# Altium PCB ESC.PcbDoc (part 2 of 2)
Units mil, origin at the board's own origin, x right, y up, seen from the top; angles counter-clockwise.
Board outline 1988.19 x 2913.39 mil, 2 copper layers (Top Layer, Bottom Layer); 78 components, 72 nets, 292 pads, 188 vias.
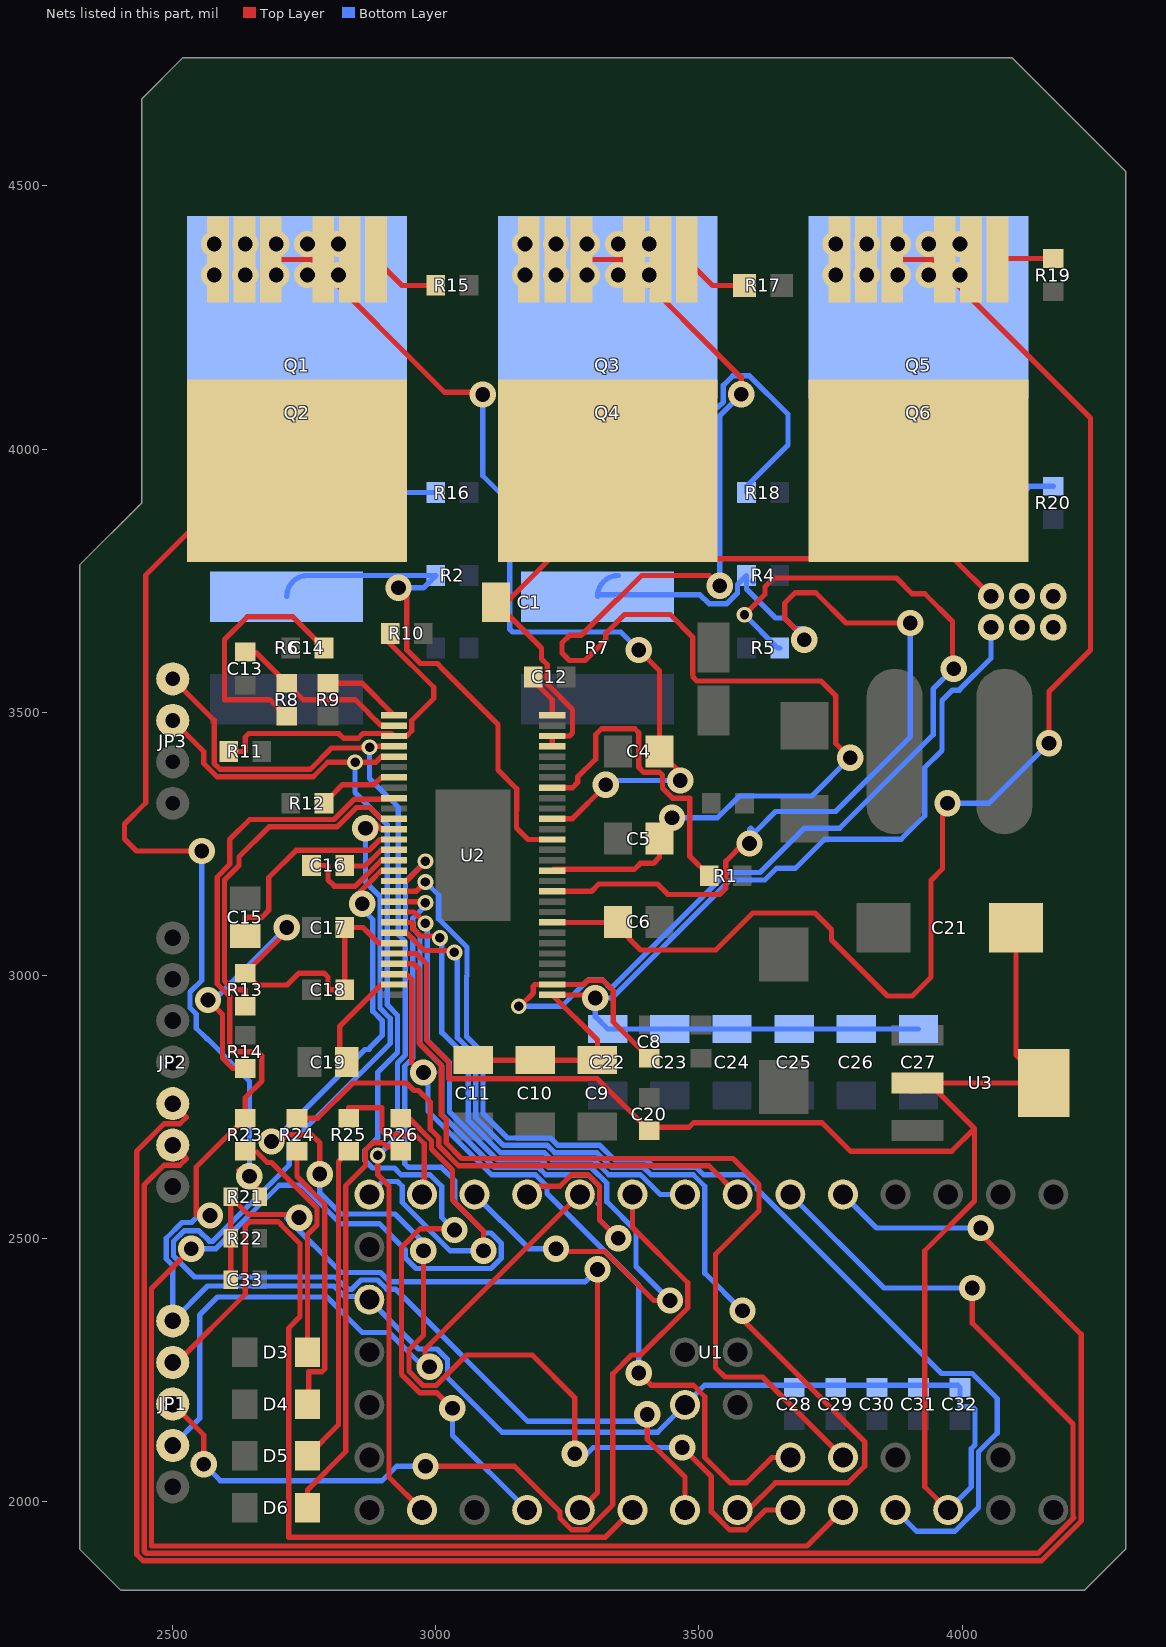
[diagram p2: the nets of this part, all layers, seen from the top]

## Via types
v1: diameter 50, hole 28, Top Layer to Bottom Layer, 133 vias
v2: diameter 20, hole 10, Top Layer to Bottom Layer, 32 vias
v3: diameter 30, hole 18, Top Layer to Bottom Layer, 23 vias

## Nets (pads, with @x,y where several pads share a name; then routed paths per layer and width w, separated by ;. In a path a pad name is that pad's centre, name@x,y a point inside that pad or via, vN(x,y) a via of type N, cw(c..) or ccw(c..) an arc to the next point about the centre after c; other vN are vias at no path point) (continued)
NetC8_2: C8.2 R5.1 U2.30 | length 2186.3
  Top Layer w10: v3(3157.48,2940.94) 3159.84,2940.94 3185.35,2966.46 3185.35,2979.69 3187.94,2982.28 3280.75,2982.28 3289.09,2990.63 3317.21,2990.63 3337.09,2970.75 3337.09,2910.95 C8.2@3405.51,2842.52 ; v3(3586.61,3685.04) 3625.67,3724.09 3625.67,3738.26 3642.13,3754.72 3875.22,3754.72 3904.91,3725.04 3929.28,3725.04 3981.99,3672.33 3981.99,3584.94 3986.67,3580.26 v1(3984.24,3582.67)
  Bottom Layer w10: v3(3157.48,2940.94) 3239.41,2940.94 3289.09,2990.63 3317.21,2990.63 3333.04,2974.8 3553.28,3195.04 3616.3,3195.04 3700.79,3279.53 3767.77,3279.53 3945.2,3456.96 3945.2,3543.62 v1(3984.24,3582.67) ; v3(3586.61,3685.04) 3649.61,3622.05 R5.1@3653.54,3622.05
NetC12_1: C12.1 U2.56 | length 87.9
  Top Layer w10: C12.1@3185.04,3566.93 3185.04,3560.17 3221.37,3523.84 U2.56@3221.37,3494.09
NetC13_2: C13.2 R8.2 U2.2 | length 340.9
  Top Layer w10: C13.2@2637.8,3614.17 2657.48,3614.17 R8.2@2716.54,3555.12 2748.03,3523.62 2847.21,3523.62 2872.52,3498.31 2872.52,3497.56 2895.67,3474.41 U2.2@2920.37,3474.41
NetC14_2: C14.2 R8.1 | length 476.7
  Top Layer w10: R8.1@2716.54,3492.13 2685.04,3523.62 2598.43,3523.62 2598.43,3637.8 2641.73,3681.1 2728.35,3681.1 C14.2@2787.4,3622.05
NetC15_1: C15.1 U2.13 | length 415.7
  Top Layer w10: C15.1@2637.8,3074.8 2637.8,3110.24 2669.29,3110.24 2682.71,3123.65 2682.71,3155.11 2682.59,3155.23 2682.59,3185.78 2734.1,3237.28 2872.97,3237.28 2893.56,3257.87 U2.13@2920.37,3257.87
NetC16_1: C16.1 U2.15 | length 209.4
  Top Layer w10: C16.1@2763.78,3208.66 2795.28,3208.66 2795.28,3181.1 2807.09,3169.29 2845.71,3169.29 2845.97,3169.56 2847.46,3169.56 2896.41,3218.5 U2.15@2920.37,3218.5
NetC16_2: C16.2 U2.14 | length 106.8
  Top Layer w10: C16.2@2826.77,3208.66 2827.94,3207.5 2865.69,3207.5 2877.98,3219.78 2880.12,3221.95 ; 2880.14,3221.95 2890.64,3232.44 2896.41,3238.19 U2.14@2920.37,3238.19
NetC17_2: C17.2 C18.2 R13.2 R14.1 U2.23 | length 957.6
  Top Layer w10: v1(2566.92,2952.75) 2594.49,2925.19 2594.49,2842.52 2614.17,2822.83 R14.1@2637.8,2822.83 ; v1(2716.53,3090.55) 2716.53,3082.67 R13.2@2637.8,3003.94 2660.51,2981.22 2717.44,2981.22 2740.16,3003.94 2787.4,3003.94 2795.28,2996.06 2795.28,2972.44 C18.2@2826.77,2972.44 C17.2@2826.77,3090.55 2861.65,3090.55 2891.18,3061.02 U2.23@2920.37,3061.02
  Bottom Layer w10: v1(2566.92,2952.75) 2578.74,2952.75 v1(2716.53,3090.55)
NetC19_2: C19.2 U2.27 | length 209.7
  Top Layer w10: C19.2@2830.71,2834.65 2817.58,2847.77 2817.58,2903.45 2896.41,2982.28 U2.27@2920.37,2982.28
NetC33_1: C33.1 R21.1 R22.1 U1.17/A3 | length 1449.6
  Top Layer w10: C33.1@2610.24,2421.26 R22.1@2610.24,2500 R21.1@2610.24,2578.74 2643.54,2545.43 2734.08,2545.43 v1(2740.15,2539.36) ; U1.17/A3@3273.62,1983.46 3307.09,2016.93 v1(3307.09,2440.94)
  Bottom Layer w10: v1@2740.15,2539.37 2717.27,2539.37 2716.53,2538.63 2820.32,2434.84 2894.9,2434.84 2912.42,2417.32 3283.46,2417.32 v1(3307.09,2440.94)
NetD3_A: D3.A R23.1 | length 462.5
  Top Layer w10: R23.1@2637.8,2665.35 2639.29,2663.86 2659.73,2663.86 2679.61,2643.98 2687.47,2643.98 2774.09,2557.36 2774.09,2525.31 2755.91,2507.12 D3.A@2755.91,2283.46
NetD4_A: D4.A R24.1 | length 530.6
  Top Layer w10: R24.1@2736.22,2665.35 2736.22,2617.35 2788.84,2564.73 2788.84,2251.76 2783.61,2246.53 2758.32,2246.53 2758.32,2187.46 D4.A@2755.91,2185.04
NetD5_A: D5.A R25.1 | length 611.4
  Top Layer w10: D5.A@2755.91,2086.61 2814.96,2145.67 2814.96,2645.67 R25.1@2834.65,2665.35
NetD6_A: D6.A R26.1 | length 804.9
  Top Layer w10: D6.A@2755.91,1988.19 2755.91,2021.98 2828.9,2094.97 2828.9,2600.55 2866.36,2638.02 2866.36,2647.03 2865.83,2647.57 2865.83,2667.4 2879.85,2681.42 2899.68,2681.42 2907.18,2673.91 2924.51,2673.91 R26.1@2933.07,2665.35
NetQ1_2: Q1.1 R15.1 | length 134.2
  Top Layer w10: Q1.1@2886.22,4360.24 2935.43,4311.02 R15.1@3000,4311.02
NetQ2_2: Q2.1 R16.1 | length 134.2
  Bottom Layer w10: Q2.1@2886.22,3868.11 2935.43,3917.32 R16.1@3000,3917.32
NetQ3_2: Q3.1 R17.1 | length 130.2
  Top Layer w10: Q3.1@3476.77,4360.24 3525.98,4311.02 R17.1@3586.61,4311.02
NetQ4_2: Q4.1 R18.1 | length 642.4
  Bottom Layer w10: Q4.1@3476.77,3868.11 3476.77,4051.57 3503.94,4078.74 3535.43,4078.74 3546.37,4089.68 3546.37,4121.18 3564.34,4139.14 3596.29,4139.14 3669.29,4066.14 3669.29,4007.9 3590.55,3929.16 R18.1@3590.55,3917.32
NetQ5_2: Q5.1 R19.1 | length 106.7
  Top Layer w10: Q5.1@4067.32,4360.24 4069.29,4362.2 R19.1@4173.23,4362.2
NetQ6_2: Q6.1 R20.1 | length 131.2
  Bottom Layer w10: Q6.1@4067.32,3868.11 4128.35,3929.13 R20.1@4173.23,3929.13
NetR1_1: R1.1 U2.49 | length 611.6
  Top Layer w10: U2.49@3221.37,3356.3 3259.44,3356.3 3269.53,3366.39 3269.53,3376.6 3303,3410.07 3303.82,3410.07 3303.82,3457.37 3314.96,3468.5 3377.95,3468.5 3385.83,3460.63 3385.83,3394.84 3394.92,3385.75 3425.28,3385.75 3430.63,3380.39 3430.63,3356.02 3450.51,3336.14 3482.75,3336.14 3482.75,3225.91 R1.1@3519.69,3188.98
NetR9_2: R9.2 U2.1 | length 150.4
  Top Layer w10: R9.2@2795.28,3555.12 2859.34,3555.12 U2.1@2920.37,3494.09
NetR10_2: R10.2 R11.1 U2.3 | length 630
  Top Layer w10: R11.1@2606.3,3425.2 2637.8,3425.2 2637.8,3452.76 2644.51,3459.47 2815.37,3459.47 2824.53,3450.32 2852.64,3450.32 2861.8,3459.47 2915.62,3459.47 U2.3@2920.37,3454.72 2944.32,3454.72 2954.3,3464.71 2954.3,3484.11 2954.16,3484.25 2996.06,3526.15 2996.06,3547.19 2912.54,3630.72 R10.2@2912.54,3650.67
NetR12_2: R12.2 U2.7 | length 133.9
  Top Layer w10: R12.2@2801.18,3340.55 2822.83,3362.2 2882.66,3362.2 2886.43,3365.98 2896.41,3375.98 U2.7@2920.37,3375.98
NetR13_1: R13.1 U2.11 | length 667.5
  Top Layer w10: R13.1@2637.8,2940.95 2637.8,2972.44 2614.94,2972.44 2598.43,2988.95 2598.43,3181.1 2625.98,3208.66 2625.98,3225.16 2682.79,3281.97 2812.35,3281.97 2849.28,3318.9 2874.76,3318.9 2896.41,3297.24 U2.11@2920.37,3297.24
NetR24_2: R24.2 U1.5 | length 992.1
  Top Layer w10: R24.2@2736.22,2728.35 2775.59,2728.35 2842.52,2795.28 2944.12,2795.28 2958.38,2781.02 2967.01,2781.02 2989.57,2758.46 2989.57,2707.33 3005.75,2691.15 3005.75,2675.33 3043.28,2637.8 3519.29,2637.8 U1.5@3573.62,2583.46
NetR25_2: R25.2 U1.11 | length 314.5
  Top Layer w10: R25.2@2834.65,2728.35 2834.65,2748.03 2897.64,2748.03 2897.64,2704.72 2905.51,2696.85 2960.63,2696.85 2977.87,2679.61 2977.87,2587.72 U1.11@2973.62,2583.46
NetR26_2: R26.2 U1.12 | length 626.9
  Top Layer w10: R26.2@2933.07,2728.35 2948.84,2728.35 2991.81,2685.38 2991.81,2669.56 3031.49,2629.88 3031.49,2572.65 3090.55,2513.59 v1(3090.55,2476.38)
  Bottom Layer w10: U1.12@2873.62,2583.46 2898.27,2608.11 2927.05,2608.11 2936.18,2598.97 2936.18,2567.96 2981.8,2522.34 2981.8,2521.37 3026.8,2476.38 v1(3090.55,2476.38)
NetU1_6: U1.6 U2.21 | length 946
  Top Layer w10: U2.21@2920.37,3100.39 2956.38,3100.39 2956.38,3088.51 2970.4,3074.49 3004.25,3074.49 v3(3007.87,3070.87)
  Bottom Layer w10: v3(3007.87,3070.87) 3011.5,3067.24 3011.5,2890.88 3061.81,2840.56 3061.81,2723.85 3122.95,2662.71 3206.45,2662.71 3220.38,2648.78 3300.67,2648.78 3328.55,2620.9 3389.13,2620.9 3426.57,2583.46 U1.6@3473.62,2583.46
NetU1_9: U1.9 U2.19 | length 1243.4
  Top Layer w10: U2.19@2920.37,3139.76 2978.35,3139.76 v3(2980.32,3137.8) ; U1.9@3173.62,2583.46 3189.13,2598.97 3236.18,2598.97 3258.12,2620.9 3289.13,2620.9 3311.06,2598.97 3311.06,2535.4 v1(3346.46,2500)
  Bottom Layer w10: v3(2980.32,3137.8) 2980.32,3132.28 2956.38,3108.34 2956.38,3088.51 2970,3074.89 2970,2869.32 3011.82,2827.5 3011.82,2734.42 3111.41,2634.84 3194.9,2634.84 3208.84,2620.9 3289.13,2620.9 3311.06,2598.97 3311.06,2567.96 3308.92,2565.82 3311.06,2563.68 3311.06,2535.4 v1(3346.46,2500)
NetU1_10: U1.10 U2.20 | length 1528.6
  Top Layer w10: U2.20@2920.37,3120.08 2958.66,3120.08 v3(2980.32,3098.43) ; v1(3228.35,2480.32) 3233.78,2474.88 3321.14,2474.88 3414.14,2381.89 v1(3444.88,2381.89)
  Bottom Layer w10: v3(2980.32,3098.43) 2983.94,3094.8 2983.94,2876.46 3025.76,2834.63 3025.76,2740.19 3117.18,2648.78 3200.67,2648.78 3214.61,2634.84 3294.9,2634.84 3325,2604.74 3325,2569.45 3380.39,2514.06 3380.39,2446.38 v1(3444.88,2381.89) ; U1.10@3073.62,2583.46 3176.77,2480.32 v1(3228.35,2480.32)
NetU1_19/A5: U1.19/A5 U2.12 | length 2392.8
  Top Layer w10: v1(2866.14,3279.52) 2874.02,3287.4 2886.54,3287.4 2896.39,3277.56 U2.12@2920.37,3277.56 ; v1(3401.57,2165.35) 3401.57,2118.12 3473.62,2046.06 U1.19/A5@3473.62,1983.46
  Bottom Layer w10: v1(2866.14,3279.52) 2866.14,3177.51 2893.97,3149.68 2893.97,2937.52 2913.39,2918.1 2913.39,2870.08 2721.54,2678.23 2721.54,2639.63 2576.46,2494.56 2569.54,2494.56 2549.86,2514.25 2521.37,2514.25 2501.49,2494.37 2501.49,2466.25 2541.06,2426.69 2808.76,2426.69 2832.06,2403.39 2840.6,2403.39 2858.12,2420.9 2889.13,2420.9 2906.64,2403.39 2923.38,2403.39 3174.4,2152.36 3398.82,2152.36 3401.57,2155.11 v1(3401.57,2165.35)
NetU1_20/A6: U1.20/A6 U2.22 | length 1897.3
  Top Layer w10: U2.22@2920.37,3080.71 2944.47,3080.71 2949.07,3076.11 2949.07,3075.96 2978.1,3046.93 3031.81,3046.93 v3(3035.43,3043.31) ; U1.20/A6@3573.62,1983.46 3582.67,1992.51 3582.67,1983.46 3593.33,1983.46 3645.3,2035.43 3783.46,2035.43 3814.96,2066.93 3814.96,2113.63 3582.67,2345.92 v1(3582.67,2362.2)
  Bottom Layer w10: v3(3035.43,3043.31) 3040.91,3037.84 3040.91,2881.18 3075.75,2846.34 3075.75,2729.63 3128.72,2676.65 3212.22,2676.65 3226.16,2662.71 3306.45,2662.71 3334.32,2634.84 3394.9,2634.84 3408.99,2620.75 3457.96,2620.75 3458.12,2620.9 3489.13,2620.9 3511.06,2598.97 3511.06,2567.96 3510.92,2567.82 3511.06,2567.68 3511.06,2433.81 v1(3582.67,2362.2)
NetU1_21/A7: U1.21/A7 U2.16 | length 2413.9
  Top Layer w10: v1(2687.6,2683.98) 2687.6,2666.77 2717.68,2696.85 2763.78,2696.85 2779.52,2681.11 v1(2779.52,2622.04) ; v1(2860.03,3135.62) 2860.03,3151.02 2854.33,3156.71 2886.43,3188.81 ; 2891.69,3194.07 2896.44,3198.82 U2.16@2920.37,3198.82 ; v1(2976.37,2476.37) 2976.37,2315.7 2948.82,2288.15 2948.82,2247.28 2975.82,2220.28 3000.56,2220.28 3058.31,2278.03 3183.35,2278.03 3263.78,2197.6 v1(3263.78,2090.55) ; v1(3468.5,2102.36) 3523.62,2047.24 3523.62,1980.52 3558.12,1946.03 3589.13,1946.03 3626.57,1983.46 U1.21/A7@3673.62,1983.46
  Bottom Layer w10: v1(2687.6,2683.98) 2687.6,2681.22 2865.07,2858.69 2874.02,2858.69 2874.02,2861.77 2897.95,2885.71 2897.95,2913.82 2880.03,2931.74 2880.03,3105.73 2860.03,3125.73 v1(2860.03,3135.62) ; v1(2779.52,2622.04) 2779.52,2586.62 2820.11,2546.03 2922.48,2546.03 2976.37,2492.13 v1(2976.37,2476.37) ; v1(3263.78,2090.55) 3275.59,2078.74 3299.21,2102.36 v1(3468.5,2102.36)
NetU1_22/A8: U1.22/A8 U2.17 | length 3638.3
  Top Layer w10: v1(2535.43,2480.31) 2459.56,2404.45 2459.56,1915.2 3705.35,1915.2 U1.22/A8@3773.62,1983.46 ; U2.17@2920.37,3179.13 2944.32,3179.13 2980.32,3215.13 v3(2980.32,3216.54)
  Bottom Layer w10: v1(2535.43,2480.31) 2581.92,2480.31 2702.47,2600.86 2745.57,2600.86 2818.87,2527.56 2892.95,2527.56 2942.43,2478.07 2942.43,2462.32 2962.31,2442.44 3104.6,2442.44 3124.49,2462.32 3124.49,2490.44 3104.61,2510.32 3093.83,2510.32 3036.18,2567.96 3036.18,2609.48 3010.83,2634.84 2947.84,2634.84 2940.94,2641.73 2940.94,2827.52 2956.06,2842.64 2956.06,3069.12 2942.44,3082.74 2942.44,3178.66 v3(2980.32,3216.54)
NetU1_23/A9: U1.23/A9 U2.18 | length 2173.7
  Top Layer w10: U2.18@2920.37,3159.45 2962.6,3159.45 v3(2980.32,3177.17)
  Bottom Layer w10: v3(2980.32,3177.17) 3005.43,3152.05 3005.43,3107.16 3059.37,3053.22 3059.37,2998.81 3058.48,2997.92 3058.48,2883.31 3089.68,2852.11 3089.68,2737.09 3136.19,2690.59 3217.99,2690.59 3231.93,2676.65 3312.22,2676.65 3340.09,2648.78 3400.67,2648.78 3414.61,2634.84 3494.9,2634.84 3508.84,2620.9 3589.13,2620.9 3611.06,2598.97 3611.06,2593.08 3960.95,2243.19 4019.45,2243.19 4066.93,2195.71 4066.93,2129.72 4031.5,2094.28 4031.5,1988.39 3986.15,1943.05 3914.03,1943.05 U1.23/A9@3873.62,1983.46
OCTW: JP3.3 U1.16/A2 U2.5 | length 2301.9
  Top Layer w10: JP3.3@2500,3484.25 2559.06,3425.2 2559.06,3402.69 2584.42,3377.32 2767.11,3377.32 2794.65,3404.86 v3(2846.46,3404.86) 2885.87,3404.86 2890.61,3409.61 ; 2890.66,3409.61 2896.41,3415.35 U2.5@2920.37,3415.35 ; v1(3031.49,2177.16) 3002.31,2206.34 2970.05,2206.34 2934.88,2241.51 2934.88,2482.88 2970.19,2518.19 3032.98,2518.19 v1(3035.43,2515.74)
  Bottom Layer w10: v3(2846.46,3404.86) 2846.46,3347.2 2907.9,3285.75 2907.9,2943.29 2927.32,2923.87 2927.32,2853.32 2889.76,2815.76 2889.76,2691.33 2865.83,2667.4 2865.83,2647.57 2879.85,2633.54 2921.32,2633.54 2933.96,2620.9 2989.13,2620.9 3011.06,2598.97 3011.06,2540.11 v1(3035.43,2515.74) ; v1(3031.49,2177.16) 3031.49,2125.6 U1.16/A2@3173.62,1983.46
PWM_IN: JP1.4 U1.18/A4 | length 1687.5
  Top Layer w10: JP1.4@2500,2264.04 2508.13,2264.04 2637.8,2393.7 2637.8,2523.62 2645.67,2531.5 2700.79,2531.5 2706.22,2526.07 2706.22,2525.31 2741.97,2489.55 2741.97,2351.27 2720.47,2329.78 2720.47,1932.09 3322.25,1932.09 U1.18/A4@3373.62,1983.46
PWRGD: JP3.4 U1.14/A0 U2.4 | length 2091.9
  Top Layer w10: JP3.4@2500,3563.25 2578.74,3484.51 2578.74,3402.72 2590.2,3391.26 2761.34,3391.26 2801.88,3431.8 2858.72,3431.8 2861.96,3435.04 U2.4@2920.37,3435.04 ; v3(2889.76,2657.48) 2889.76,2620.27 2911.06,2598.97 2911.06,2046.03 U1.14/A0@2973.62,1983.46
  Bottom Layer w10: v3(2874.02,3433.07) 2874.02,3374.02 2928.5,3319.53 2928.5,3076.96 2942.13,3063.34 2942.13,2848.41 2927.01,2833.29 2927.01,2694.72 v3(2889.76,2657.48)
QUAD_A: JP2.3 U1.3 | length 3679.5
  Top Layer w10: JP2.3@2500,2755.91 2525.81,2730.1 2513.32,2717.6 2483.25,2717.6 2431.69,2666.04 2431.69,1898.99 2443.36,1887.32 4151.13,1887.32 4226.54,1962.73 4226.54,2317.52 4035.43,2508.62 v1(4035.43,2519.68)
  Bottom Layer w10: U1.3@3773.62,2583.46 3837.4,2519.68 v1(4035.43,2519.68)
QUAD_B: JP2.2 U1.4 | length 3566.9
  Top Layer w10: JP2.2@2500,2677.17 2525.81,2651.36 2513.32,2638.86 2483.25,2638.86 2445.63,2601.24 2445.63,1904.77 2449.13,1901.26 4144.36,1901.26 4211.61,1968.5 4212.6,1968.5 4211.06,1970.04 4211.06,2147.21 4019.68,2338.58 v1(4019.68,2405.51)
  Bottom Layer w10: U1.4@3673.62,2583.46 3851.57,2405.51 v1(4019.68,2405.51)
SER_RX: JP1.3 U1.7 | length 1720.2
  Top Layer w10: JP1.3@2500,2185.04 2559.05,2125.99 v1(2559.05,2070.86) ; v1(2980.32,2066.93) 3149.61,2066.93 3236.18,1980.35 3236.18,1967.96 3258.12,1946.03 3289.13,1946.03 3336.18,1993.08 3336.18,2242.45 3371.77,2278.03 3389.02,2278.03 3478.82,2367.83 3478.82,2415.63 3373.62,2520.83 U1.7@3373.62,2583.46
  Bottom Layer w10: v1(2559.05,2070.86) 2590.54,2039.37 2897.64,2039.37 2925.2,2066.93 v1(2980.32,2066.93)
SER_TX: JP1.2 U1.8 | length 1228.2
  Top Layer w10: v1(2988.19,2255.91) 2979.45,2264.65 2979.45,2289.29 U1.8@3273.62,2583.46
  Bottom Layer w10: JP1.2@2500,2106.3 2551.18,2157.48 2551.18,2354.33 2585.12,2388.27 2792.83,2388.27 2860.2,2320.9 2911.06,2320.9 2976.05,2255.91 v1(2988.19,2255.91)
SH_A: C4.2 Q1.2 Q2.8 U2.46 | length 1792.8
  Top Layer w10: Q1.2@2686.22,4360.24 2764.63,4360.24 3017.08,4107.79 3085.12,4107.79 v1(3089.17,4103.74) ; U2.46@3221.37,3297.24 3259.06,3297.24 3322.83,3361.02 v1(3322.83,3362.2) ; v1(3385.83,3618.11) 3425.2,3578.74 C4.2@3425.2,3425.2 3464.57,3385.83 v1(3464.57,3370.08)
  Bottom Layer w10: v1(3089.17,4103.74) 3089.17,3949.33 3140.67,3897.84 3140.67,3657.72 3145.9,3652.48 3351.46,3652.48 v1(3385.83,3618.11) ; v1(3322.83,3362.2) 3330.71,3370.08 v1(3464.57,3370.08)
  other v1: 2578.74,4330.71 2637.8,4330.71 2696.85,4330.71 2755.91,4330.71 2814.96,4330.71 2578.74,4389.76 2637.8,4389.76 2696.85,4389.76 2755.91,4389.76 2814.96,4389.76
SH_B: C5.2 Q3.2 Q4.8 U2.41 | length 2680.7
  Top Layer w10: U2.41@3221.37,3198.82 3223.96,3201.42 3377.47,3201.42 3388.65,3212.6 3413.39,3212.6 3425.2,3224.41 C5.2@3425.2,3248.03 ; Q3.2@3276.77,4360.24 3356.3,4360.24 3580.31,4136.23 v1(3580.31,4103.93) ; C5.2@3425.2,3259.84 3425.2,3283.47 3440.94,3299.21 v1(3448.81,3299.21) ; v1(3539.37,3740.16) 3519.69,3759.84 3391.34,3759.84 3344.73,3713.23 3343.14,3713.23 3275.89,3645.98 3253.86,3645.98 3239.84,3631.95 3239.84,3612.12 3253.86,3598.1 3283.17,3598.1 3323.15,3638.09 3323.15,3649.9 3358.61,3685.35 3445.53,3685.35 3488.11,3642.77 3488.11,3572.09 3488.58,3571.61 3488.58,3566.53 3495.98,3559.13 3732.2,3559.13 3759.84,3531.5 3759.84,3440.94 v1(3787.4,3413.39)
  Bottom Layer w10: v1(3448.81,3299.21) 3535.4,3299.21 3576.9,3340.71 3714.72,3340.71 v1(3787.4,3413.39) ; v1(3539.37,3740.16) 3539.37,4062.99 3541.18,4064.8 3560.31,4083.91 ; 3560.31,4083.93 3582.67,4106.29 v1(3580.31,4103.93)
  other v1: 3169.29,4330.71 3228.35,4330.71 3287.4,4330.71 3346.46,4330.71 3405.51,4330.71 3169.29,4389.76 3228.35,4389.76 3287.4,4389.76 3346.46,4389.76 3405.51,4389.76
SH_C: C6.2 Q5.2 Q6.8 U2.36 | length 2631.8
  Top Layer w10: U2.36@3221.37,3100.39 3345.63,3100.39 3345.63,3091.35 3389.15,3047.83 3532.06,3047.83 3602.34,3118.11 3720.5,3118.11 3751.97,3086.64 3751.97,3066.93 3858.27,2960.63 3905.51,2960.63 3940.94,2996.06 3940.94,3180.35 3963.07,3202.48 3963.07,3317.4 v1(3972.44,3326.77) ; Q5.2@3887.4,4340.16 Q5.2@3867.32,4360.24 3942.91,4360.24 4244.09,4059.06 4244.09,3618.11 4165.35,3539.36 v1(4165.35,3440.94)
  Bottom Layer w10: v1(3972.44,3326.77) 4051.18,3326.77 v1(4165.35,3440.94)
  other v1: 3759.84,4330.71 3818.9,4330.71 3877.95,4330.71 3937.01,4330.71 3996.06,4330.71 3759.84,4389.76 3818.9,4389.76 3877.95,4389.76 3937.01,4389.76 3996.06,4389.76
SL_A: Q2.2 R2.2 R6.2 U2.44 | length 1056.3
  Top Layer w10: v1(2929.13,3736.22) 2944.88,3720.47 2944.88,3618.09 2970.61,3592.36 3002.9,3592.36 3010,3585.26 3010,3584.77 3118.11,3476.66 3118.11,3389.8 3153.54,3354.37 3153.54,3313.38 3153.22,3313.06 3153.22,3279.85 3175.2,3257.87 U2.44@3221.37,3257.87
  Bottom Layer w10: R6.2@2716.54,3719.69 cw(c2756.69,3719.69) 2756.69,3759.84 R2.2@3000,3759.84 2976.38,3736.22 v1(2929.13,3736.22) v1@2929.13,3759.79
SL_B: Q4.2 R4.2 R7.2 U2.39 | length 2019.2
  Top Layer w10: U2.39@3221.37,3159.45 3295.54,3159.45 3309.63,3173.54 3420.97,3173.54 3440.97,3153.54 3539.37,3153.54 3551.18,3165.35 3551.18,3216.54 3584.92,3250.28 v1(3596.17,3250.28) ; v1(3700.2,3637.74) 3700.2,3641.57 3662.91,3678.86 3662.91,3706.97 3682.79,3726.85 3721.97,3726.85 3779.53,3669.28 v1(3901.57,3669.28)
  Bottom Layer w10: R7.2@3347.24,3759.84 ccw(c3347.24,3719.69) R7.2@3307.09,3719.69 3310.31,3722.91 3502.25,3722.91 3518.94,3706.22 3553.43,3706.22 3573.31,3726.1 3573.31,3742.6 R4.2@3590.55,3759.84 3590.55,3733.84 3645.53,3678.86 3662.91,3678.86 3682.79,3658.98 3699.28,3658.98 3700.2,3658.06 v1(3700.2,3637.74) ; v1(3596.17,3250.28) 3596.17,3277.26 3598.43,3279.51 3606.29,3271.65 3645.67,3311.02 3759.84,3311.02 3901.57,3452.75 v1(3901.57,3669.28) ; R4.2@3601.38,3749.01 R4.2@3603.27,3747.13
SO1: U1.A10 U2.25 | length 1726.4
  Top Layer w10: U2.25@2920.37,3021.65 2958.44,3021.65 2968.24,3011.85 2968.24,2871.08 3010.31,2829.01 3010.31,2734.64 3019.68,2725.26 3019.68,2681.1 3049.06,2651.73 3564.8,2651.73 3614.17,2602.36 3614.17,2552.51 3531.5,2469.83 3531.5,2254.08 3549.36,2236.22 3620.87,2236.22 U1.A10@3773.62,2083.46
SO2: U1.A11 U2.26 | length 1500.9
  Top Layer w10: U2.26@2920.37,3001.97 2944.32,3001.97 2954.3,2991.99 2954.3,2833.09 2972.43,2814.95 v1(2976.37,2814.95) ; v1(3385.83,2244.09) 3409.02,2220.9 3489.13,2220.9 3511.06,2198.97 3511.06,2083.43 3559.06,2035.43 3590.55,2035.43 3638.58,2083.46 U1.A11@3673.62,2083.46
  Bottom Layer w10: v1(2976.37,2814.95) 2997.88,2814.95 2985.16,2802.23 2985.16,2741.38 3105.63,2620.9 3189.13,2620.9 3211.06,2598.97 3211.06,2584.97 3385.83,2410.2 v1(3385.83,2244.09)
VCC: C20.1 C21.1 C28.2 C29.2 C30.2 C31.2 C32.2 JP1.5 R23.2 U1.3.3V U2.9 U2.24 U3.2 | length 6339.4
  Top Layer w10: v1(2570.86,2543.3) 2569.36,2544.8 2544.8,2544.8 2544.8,2635.35 R23.2@2637.8,2728.35 2637.8,2767.72 2669.29,2799.21 2669.29,2846.46 2661.42,2854.33 2614.17,2854.33 2608.43,2860.08 2608.43,2959.24 2584.49,2983.18 2584.49,3186.88 2608.16,3210.55 2608.16,3257.79 2646.27,3295.91 2806.58,3295.91 2845.32,3334.65 U2.9@2920.37,3334.65 ; U2.24@2920.37,3041.34 2962.62,3041.34 2982.18,3021.78 2982.18,2876.85 3024.25,2834.78 3024.25,2830.71 3024.53,2830.43 3024.53,2803.07 3111.97,2803.07 3112.05,2803.15 3147.79,2803.15 3147.87,2803.07 3230.08,2803.07 3230.16,2803.15 3265.9,2803.15 3265.98,2803.07 3307.17,2803.07 C20.1@3405.51,2704.72 3411.89,2711.1 3481.38,2711.1 3489.88,2719.61 3733.9,2719.61 3788.15,2665.35 3980.31,2665.35 4023.62,2708.66 ; U3.2@3921.13,2780.59 3900.67,2780.59 U3.2@3915.35,2795.28 U3.2@3937.01,2795.28 ; U1.3.3V@3973.62,1983.46 3929.13,2027.95 3929.13,2476.38 4023.62,2570.87 4023.62,2708.66 ; C21.1@4102.44,3090.28 4102.44,2848.35 U3.2@4155.51,2795.28 U3.2@3937.01,2795.28 ; U3.2@3937.01,2795.28 4023.62,2708.66
  Bottom Layer w10: v1(2570.86,2543.3) 2549.07,2543.3 2535.89,2530.11 2517.53,2530.11 2487.55,2500.14 2487.55,2460.48 2500,2448.03 JP1.5@2500,2343.04 2566.41,2409.45 2806.29,2409.45 2826.29,2389.45 2867.64,2389.45 2967.24,2289.84 3002.25,2289.84 3022.13,2269.96 3022.13,2234.96 3125.67,2131.41 3421.57,2131.41 3511.06,2220.9 C32.2@3991.7,2220.9 ; U1.3.3V@3973.62,1983.46 4017.56,2027.4 4017.56,2100.05 4024.69,2107.18 4024.69,2174.96 4019.45,2180.2 3996.06,2180.2 C32.2@3996.06,2216.54
VDD: C1.1 C9.2 C10.2 C11.2 C22.2 C23.2 C24.2 C25.2 C26.2 C27.2 Q1.8 Q3.8 Q5.8 R21.2 U2.29 U2.53 U2.54 | length 5495.1
  Top Layer w10: v1(2555.12,3236.22) 2431.2,3236.22 2408.25,3259.17 2408.25,3287.29 2448.82,3327.86 2448.82,3760.59 2646.89,3958.66 Q1.8@2736.22,3958.66 ; v1@2625.23,2629.92 v1@2637.05,2618.11 ; v1(2645.66,2618.11) v1@2637.05,2618.11 ; R21.2@2665.35,2578.74 2665.35,2589.8 v1@2637.05,2618.11 ; C11.2@3070.87,2838.58 C10.2@3188.98,2838.58 C9.2@3307.09,2838.58 3307.09,2876.88 U2.29@3221.37,2962.6 3297.24,2962.6 v1(3303.15,2956.69) ; U2.53@3221.37,3435.04 U2.54@3221.37,3454.72 3253.94,3454.72 3259.84,3460.63 3259.84,3505.08 3211.96,3552.96 3211.96,3590.05 3200.79,3601.22 3200.79,3622.05 C1.1@3114.17,3708.66 3133.86,3708.66 3216.53,3791.34 3984.25,3791.34 v1(4055.12,3720.47)
  Bottom Layer w10: v1(2555.12,3236.22) 2555.12,2990.06 2532.99,2967.93 2532.99,2938.11 2544.8,2926.29 2544.8,2899.32 2564.68,2879.44 2565.46,2879.44 2608.43,2836.48 2608.43,2835.7 2645.67,2798.45 v1(2645.66,2618.11) ; C27.2@3917.32,2897.64 C26.2@3799.21,2897.64 C25.2@3681.1,2897.64 C24.2@3562.99,2897.64 C23.2@3444.88,2897.64 C22.2@3326.77,2897.64 3303.15,2921.26 v1(3303.15,2956.69) 3334.65,2956.69 3559.06,3181.1 3625.23,3181.1 3647.36,3203.23 3683.54,3203.23 3738.66,3258.35 3872.52,3258.35 3872.81,3258.64 3884.62,3258.64 3929.13,3303.15 3929.13,3394.45 3962.12,3427.44 3962.12,3521.92 3982,3541.8 3994.56,3541.8 4055.12,3602.36 v1(4055.12,3661.42)
  other v1: 4114.17,3661.42 4173.23,3661.42 4114.17,3720.47 4173.23,3720.47
pads on no net: U1.13 U1.A12 U1.A13 U1.AGND U1.AREF U1.PGM U1.RST U1.VBAT U1.VIN U1.VUSB U2.55

## Polygon pours and split planes (outlines as drawn)
GND on Bottom Layer "GND_L02_P048" (solid, remove dead copper, pour order 48): 2421.26,1870.08 2362.2,1929.13 2362.2,3759.84 2480.32,3877.95 2480.32,4645.67 2539.37,4704.72 4074.8,4704.72 4271.65,4507.87 4271.65,1929.13 4212.6,1870.08
GND on Top Layer "GND_L01_P050" (solid, remove dead copper, pour order 50): 2421.26,1870.08 2362.2,1929.13 2362.2,3759.84 2480.32,3877.95 2480.32,4645.67 2539.37,4704.72 4074.8,4704.72 4271.65,4507.87 4271.65,1929.13 4212.6,1870.08

## Keep-outs
Keep-Out Layer:
  lines w10: 2440.94,4665.35 2440.94,4665.35 ; 2440.94,4665.35 2519.68,4744.09 4094.49,4744.09 4311.02,4527.56 4311.02,1909.45 4232.28,1830.71 2401.57,1830.71 2322.83,1909.45 2322.83,3779.53 2440.94,3897.64 2440.94,4665.35

## Other copper
Top Layer:
  region net VDD: 2519.68,4071.93 cw(c2522.56,4071.93) 2522.56,4074.8 4114.17,4074.8 cw(c4066.93,3937.01) 4212.6,3937.01 4212.6,3622.05 4042.45,3622.05 ccw(c3881,3579.97) 3996.06,3700.79 ccw(c3799.22,3494.11) 3799.21,3779.52 2519.68,3779.53
  region net SH_A: 2552.37,4271.65 2552.37,4630.83 cw(c2606.58,4630.83) 2606.58,4685.04 2764.5,4685.04 2764.5,4532.49 ccw(c2854.33,4532.49) 2854.33,4442.66 2854.33,4271.65
  region net SH_B: 3142.92,4271.65 3142.92,4630.83 cw(c3197.13,4630.83) 3197.13,4685.04 3355.05,4685.04 3355.05,4532.49 ccw(c3444.88,4532.49) 3444.88,4442.66 3444.88,4271.65
  region net SH_C: 3733.48,4271.65 3733.48,4630.83 cw(c3787.68,4630.83) 3787.68,4685.04 3945.61,4685.04 3945.61,4532.49 ccw(c4035.43,4532.49) 4035.43,4442.66 4035.43,4271.65
Bottom Layer:
  region net SL_A: 2559.06,3956.69 2854.33,3956.69 2854.33,3661.42 2559.06,3661.42
  region net SL_B: 3149.61,3956.69 3444.88,3956.69 3444.88,3661.42 3149.61,3661.42
  region net VDD: 4212.6,3759.84 4212.6,3580.09 cw(c4175.81,3580.09) 4175.81,3543.31 4062.72,3543.31 cw(c4062.72,3590.28) 4015.75,3590.28 ccw(c3852.37,3602.39) 3933.09,3744.96 cw(c3937.01,3751.88) 3937.01,3759.84
  region net GND: 4035.43,3956.69 3740.16,3956.69 3740.16,3661.42 cw(c3661.42,3661.42) 3661.42,3582.68 2559.06,3582.68 2559.06,3464.57 2874.02,3464.57 cw(c2874.02,3425.2) 2913.39,3425.2 2913.39,3385.83 ccw(c2933.07,3385.83) 2933.07,3366.14 3090.55,3366.14 ccw(c3090.55,3385.83) 3110.24,3385.83 3110.24,3425.2 cw(c3149.61,3425.2) 3149.61,3464.57 3779.53,3464.57 ccw(c3779.53,3543.31) 3858.27,3543.31 3858.27,3720.47 cw(c3917.32,3720.47) 3917.32,3779.53 4035.43,3779.53

## Silkscreen, mask and mechanical layers (free items; w line width, h text height)
Bottom Overlay:
  text "ESC v1.0 - Raphael Chang" at 4208.66,1877.95 h40

## Text inside footprints (layer, text, board x,y; h text height)
U2: Top Overlay "*" at 2961.37,3446.09 h50; Mechanical 1 "*" at 2961.37,3446.09 h50